# EAGLE board ANAL_5_PSU_REV_1_0 (EAGLE 7.6.0)
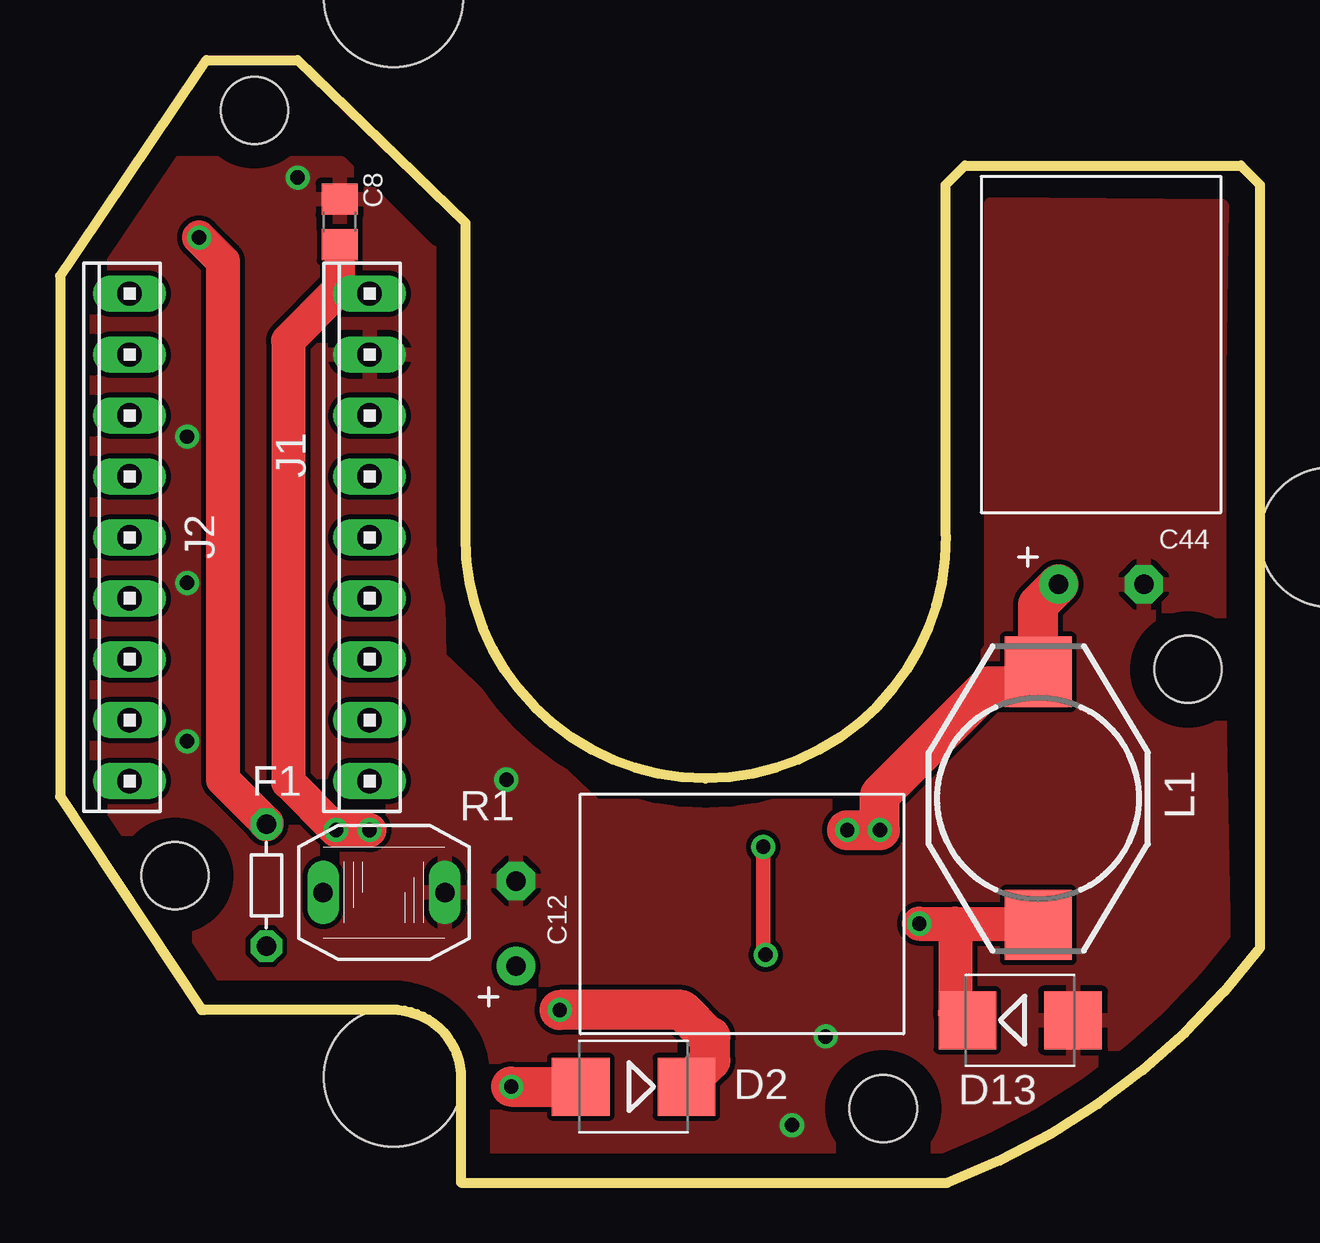
[diagram p0: board, top side]
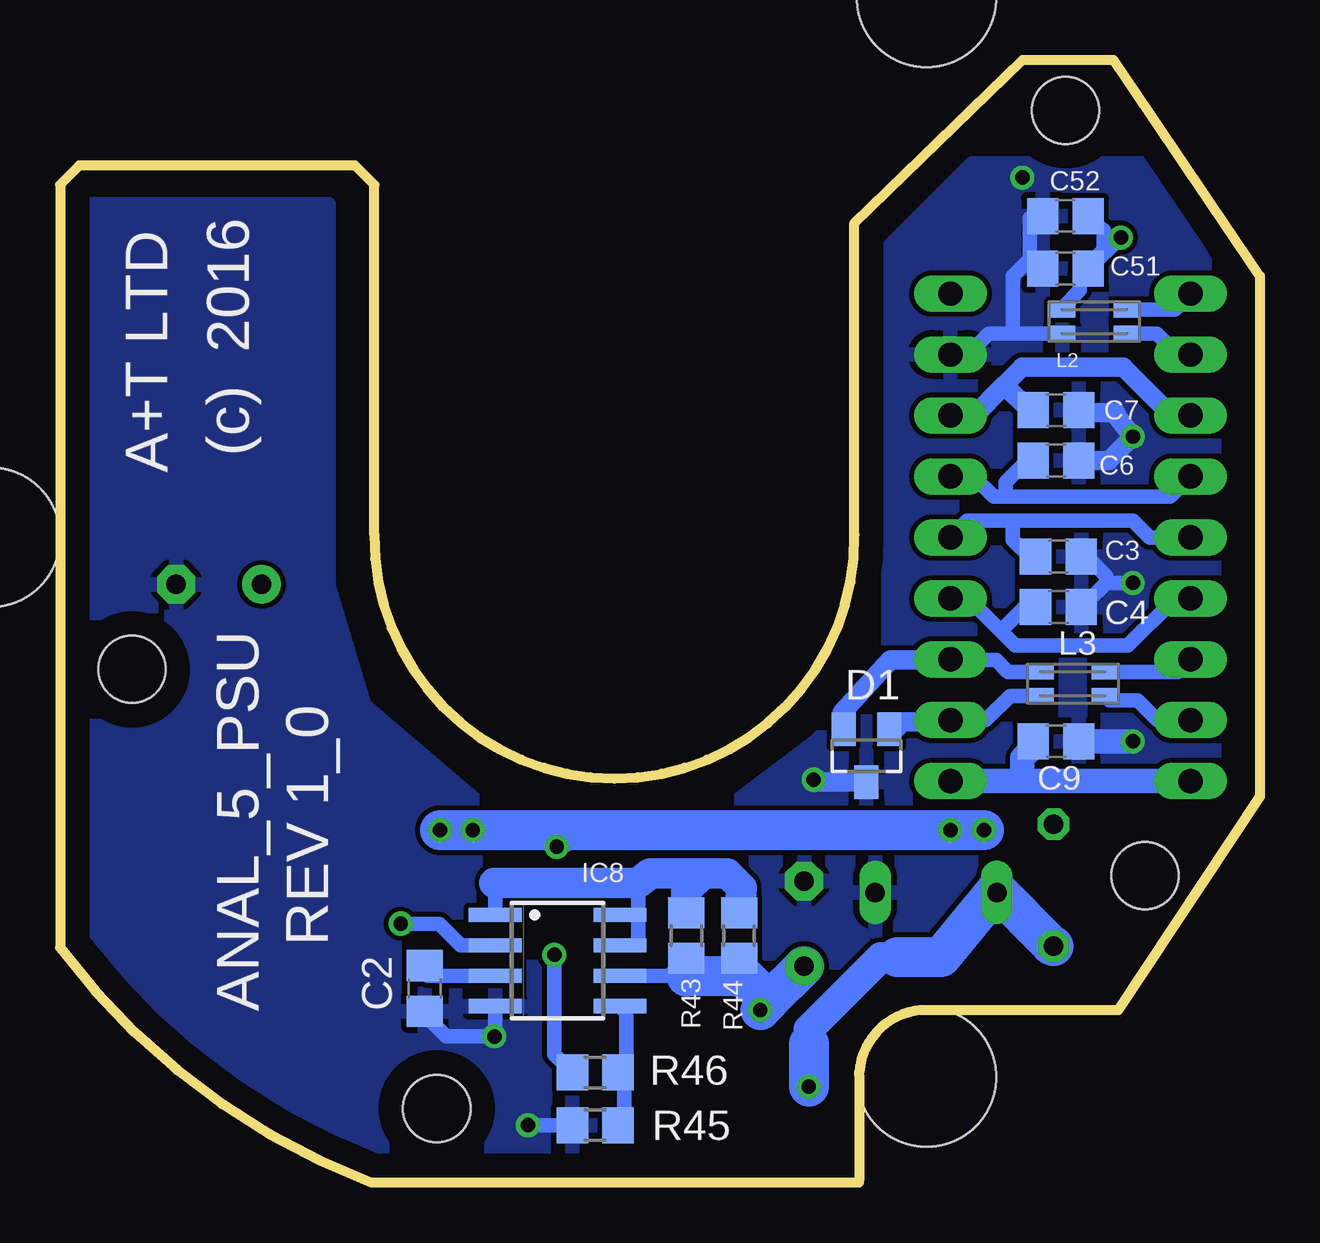
[diagram p1: board, bottom side, seen from below]

Size 50 x 46.8 mm. Coordinates in mm from the lower left corner, seen from the top.
Outline: 16.7,0 37,0 arc32 50,9.8 50,41.6 49.2,42.4 37.7,42.4 36.9,41.6 36.9,27 arc-182 16.9,27 16.9,40 9.9,46.8 6.1,46.8 0,37.8 0,16.1 5.9,7.2
Outline: 6,7.2 14.1,7.2 arc-81 16.7,4.6
Outline: 16.7,4.5 16.7,0.1 16.8,0
Copper layers (1*16): Top 0.035mm / dielectric 1.5mm / Bottom 0.035mm
Design rules "default *": minimum track width 6mil, minimum drill 15mil, track to track 8mil, track to pad 8mil, pad to pad 8mil, via to via 8mil, smd to smd 8mil, copper to edge 40mil, drill to drill 8mil, minimum pad ring 10mil, minimum via ring 8mil, stop-mask expansion 4mil, vias tented up to drill 0mil, thermal gap 10mil
Holes 5.8 mm at 13.9,49.4 13.9,4.4 52.9,26.9
Holes 2.8 mm at 47,21.4 34.3,3.1 4.8,12.8 8.1,44.7

## Footprints (pad centres in the part's own frame; a part is rotated, then mirrored left to right if it is on the bottom)
C0805 = smd 1.3 x 1.5: 1 -0.95,0; 2 0.95,0
E3,5-10SIDE2 = drill 0.813 pad 1.6: + -1.778,0 | drill 0.813 pad 1.6 octagon: - 1.778,0
E3,5-10SIDE = drill 0.813 pad 1.6: + -1.778,0 | drill 0.813 pad 1.6 octagon: - 1.778,0
SOT23 = smd 1 x 1.4: 1 -0.95,-1.1; 2 0.95,-1.1; 3 0,1.1
SMB = smd 2.4 x 2.4: A 2.2,0; C -2.2,0
R-5 = drill 0.813 octagon: 1 -2.54,0; 2 2.54,0
SO08 = smd 0.6 x 2.2: 1 -1.905,-2.6; 2 -0.635,-2.6; 3 0.635,-2.6; 4 1.905,-2.6; 5 1.905,2.6; 6 0.635,2.6; 7 -0.635,2.6; 8 -1.905,2.6
10X09MTA = drill 1.016 long: 1 10.16,0; 2 7.62,0; 3 5.08,0; 4 2.54,0; 5 0,0; 6 -2.54,0; 7 -5.08,0; 8 -7.62,0; 9 -10.16,0
DO3316P = smd 2.92 x 2.79: 1 -5.28,0; 2 5.28,0
DLW31S = smd 0.66 x 1.1: 1 -0.5,-1.35; 2 -0.5,1.35; 3 0.5,1.35; 4 0.5,-1.35
P592 = drill 0.813 long: 1 0,2.54; 2 0,-2.54
R0805 = smd 1.3 x 1.5: 1 -0.95,0; 2 0.95,0

## Placement (x,y rotation side)
C2  470p  [C0805]  34.8,8.1 270 bottom
C3  1n  [C0805]  8.4,26.1 0 bottom
C4  1n  [C0805]  8.4,24 0 bottom
C6  330p  [C0805]  8.5,30.1 0 bottom
C7  330p  [C0805]  8.5,32.2 0 bottom
C8  100n  [C0805]  11.65,40.05 90 top
C9  1n  [C0805]  8.5,18.4 0 bottom
C12  100u  [E3,5-10SIDE2]  19,10.8 90 top
C44  470u  [E3,5-10SIDE]  43.38,24.94 0 top
C51  100n  [C0805]  8.1,38.1 180 bottom
C52  1n  [C0805]  8.1,40.3 180 bottom
D1  NUP2105L  [SOT23]  16.4,17.8 180 bottom
D2  STPS160U  [SMB]  23.9,4 180 top
D13  STPS160U  [SMB]  40.01,6.77 0 top
F1  330mA  [R-5]  8.6,12.4 90 top
IC8  MC34063AD  [SO08]  29.27,9.26 270 bottom
J1  Samtec TSW-109-15-F-S  [10X09MTA]  12.9,26.9 90 top
J2  [10X09MTA]  2.9,26.9 90 top
L1  [DO3316P]  40.76,16.02 90 top
L2  Coilcraft 1206USB-102MLB  [DLW31S]  6.9,35.9 90 bottom
L3  DLW31SN222SQ2L  [DLW31S]  7.8,20.8 270 bottom
R1  27Z1  [P592]  13.5,12.1 90 top
R43  0R5  [R0805]  23.9,10.3 270 bottom
R44  0R5  [R0805]  21.7,10.3 270 bottom
R45  3k3  [R0805]  27.7,2.4 0 bottom
R46  10k  [R0805]  27.7,4.6 0 bottom

## Library data of the parts
C2-C4 C6-C9 C51 C52 R43-R46 = rcl
C12 C44 L2 L3 = AWR
D1 = AWR; FARNELL: 2101833
D2 D13 = diode
F1 R1 = varistor
IC8 = v-reg-3
J1 J2 = con-amp
L1 = inductor-coilcraft; OC_FARNELL: unknown; OC_NEWARK: unknown

## Nets
+5V: C8.1 C44.+ J1.1 L1.2 R46.1
+12V: C12.+ D2.C IC8.6 R43.2 R44.2
FUSED: D2.A F1.1 R1.1
GND: C2.2 C3.2 C4.2 C6.2 C7.2 C8.2 C9.2 C12.- C44.- C51.2 C52.2 D1.3 D13.A IC8.4 J1.2 L2.2 R1.2 R45.1
N$1: C3.1 J1.5 J2.5
N$2: C6.1 J1.4 J2.4
N$3: C4.1 J1.6 J2.6
N$4: D1.2 J1.7 L3.1
N$5: D1.1 J1.8 L3.4
N$6: C9.1 J1.9 J2.9
N$7: J2.2 L2.1
N$8: J2.1 L2.4
N$9: J2.7 L3.2
N$11: J2.8 L3.3
N$14: C7.1 J1.3 J2.3
N$79: D13.C IC8.2 L1.1
N$81: IC8.1 IC8.7 IC8.8 R43.1 R44.1
N$83: IC8.5 R45.2 R46.2
N$84: C2.1 IC8.3
SUPPLY: C51.1 C52.1 F1.2 L2.3

## Tracks (layer width: path | path; a pad name or v marks a point on that pad's centre or on a via)
+5V  (via drill 0.6)
  Top 0.61: v29.3,14 29.2,14 29.3,14.1 v29.3,14 | v29.3,14 29.3,9.6 v29.4,9.5
  Top 1.27: C8.1 11.65,37.25
  Top 1.422: 11.5,37.1 9.5,35.1 9.5,16.7 v11.5,14.7 v12.9,14.7 | 11.5,37.1 12.94,37.1 J1.1 | 11.65,37.25 11.5,37.1
  Top 1.676: v32.8,14.7 v34.16,14.7 34.16,16.16 38.7,20.7 40.16,20.7 L1.2 40.76,24.1 C44.+
  Bottom 0.61: v29.4,9.5 29.4,5.35 R46.1
  Bottom 0.813: v29.3,14 28.1,14.6 28.2,14.7
  Bottom 1.422: v11.5,14.7 v12.9,14.7
  Bottom 1.676: v11.5,14.7 28.2,14.7 v32.8,14.7 v34.16,14.7
+12V  (via drill 0.6)
  Top 1.676: D2.C 26.1,4.1 27.1,5.1 27.1,6.1 27,6.1 25.9,7.2 v20.82,7.2
  Bottom 0.61: IC8.6 24.62,8.62 24.27,8.97 | 24.27,8.97 R43.2 | 24.27,8.97 23.9,8.6 | 21.6,9.3 21.6,8.8 21.8,8.6
  Bottom 1.016: R44.2 21.6,9.3
  Bottom 1.676: 23.9,8.6 21.8,8.6 21.5,8.6 20.46,7.56 | v20.82,7.2 20.46,7.56 | 20.46,7.56 C12.+
FUSED  (via drill 0.6)
  Top 1.676: v18.8,4 D2.A
  Bottom 1.27: 15.1,9.4 15.8,9.4 18.8,6.4 18.8,5.8
  Bottom 1.676: F1.1 8.7,9.9 11,12.2 | 11,12.2 R1.1 10.96,11.74 11,12.2 | 11,12.2 13.3,9.4 15.1,9.4 | 18.8,5.8 v18.8,4
GND  (via drill 0.6)
  Bottom 0.61: IC8.4 31.87,6.6 | 31.87,6.6 31.87,6.13 v31.9,6.1 | C2.2 34.55,6.75 33.9,6.1 v31.9,6.1 | v31.9,6.1 31.87,6.6 | 9.6,39.8 9,40.2 9.6,40.2 9.6,39.8 | J1.2 12.72,34.7 12,34.7 11.3,35.4 10.2,35.4 | C3.2 7.2,26.1 6.4,25.3 6.4,25 | 6.4,25 6.9,24.5 6.95,24.5 C4.2 | 6.4,25 v5.3,25 | R45.1 v30.5,2.4 | 9.6,38.5 9.05,38.5 C51.2 | L2.2 10.2,35.4 | 10.2,35.4 10.3,35.5 10.3,37.8 9.6,38.5 | 9.6,39.8 9.6,38.5
  Bottom 0.813: C6.2 6.3,30.1 v5.3,31.1 6,32 6,32.1 7.45,32.1 C7.2 | D1.3 18.5,16.7 v18.6,16.8
  Bottom 1.016: C9.2 v5.3,18.4
  other vias: 9.9,41.9
  pour Top: 4.6,42.5 11.7,42.5 15.3,38.9 15.5,38.8 15.8,21.9 22.3,15.7 33.5,15.7 38.8,22.3 38.8,40.8 48.4,40.7 48.3,33.8 48.3,19.8 48.5,10.1 47.1,7.5 43.5,4.3 40.5,3.3 38.5,0.9 32.9,-0.1 27.7,-1.5 21.7,-0.9 11.5,3.7 6.1,8.9 3.7,11.3 0.9,16.5 -0.3,22.9 -0.3,31.3 0.7,36.3
  pour Bottom: 4.8,42.5 12,42.5 15.5,39 15.5,22.2 18.4,18.5 22.1,15.7 32.4,15.7 37.3,19.9 38.8,24.9 38.8,40.8 48.7,40.8 48.7,10.6 45.5,6.8 41.6,3.8 36.8,1.3 18.1,1.3 18.1,5.2 17.3,7.1 14.8,8.6 6.4,8.6 1.9,15.6 1.9,37.8
N$1
  Bottom 0.61: 10.3,27.6 5.3,27.6 4.6,26.9 J2.5 | 10.3,27.6 12.2,27.6 J1.5 | C3.1 9.6,26.1 10.3,26.8 10.3,27.6
N$2
  Bottom 0.61: J1.4 11.94,29.44 11.1,28.6 10.4,28.6 | 10.4,28.6 3.74,28.6 J2.4 | C6.1 9.7,30.1 10.6,29.2 10.6,28.8 10.4,28.6
N$3
  Bottom 0.61: J1.6 12.16,24.36 10.8,23 | 10.8,23 10.2,22.4 5.5,22.4 3.6,24.3 2.96,24.3 J2.6 | C4.1 9.8,24 10.8,23
N$4
  Bottom 0.61: L3.1 10.5,21.3 11,21.8 12.88,21.8
  Bottom 0.813: 12.88,21.8 J1.7 12.92,21.8 15.4,21.8 17.4,19.6 17.4,18.95 D1.2
N$5
  Bottom 0.61: J1.8 11.42,19.28 10.4,20.3 L3.4
  Bottom 0.813: D1.1 15.2,18.9 14.9,19.2 12.98,19.2 J1.8
N$6
  Bottom 1.016: J2.9 9.9,16.74 | 9.9,16.74 J1.9 | C9.1 9.45,18.15 9.9,17.7 9.9,16.74
N$7
  Bottom 0.61: L2.1 4.3,35.4 3.6,34.7 3.08,34.7 J2.2
N$8
  Bottom 0.61: L2.4 3.56,36.4 J2.1
N$9
  Bottom 0.61: L3.2 3.42,21.3 J2.7
N$11
  Bottom 0.61: J2.8 4.28,19.28 5.1,20.1 6.25,20.1 L3.3
N$14
  Bottom 0.813: J2.3 3.68,31.98 5.7,34 9.9,34 10.65,33.25 | 10.65,33.25 12,31.9 12.82,31.9 J1.3 | C7.1 9.6,32.2 10.65,33.25
N$79  (via drill 0.6)
  Top 0.61: 40.7,10.8 L1.1
  Top 1.422: 37.3,10.8 40.7,10.8 | v35.8,10.8 37.3,10.8 | 37.3,10.8 37.3,7.08 D13.C
  Bottom 0.61: IC8.2 33.29,9.89 34.2,10.8 v35.8,10.8
N$81
  Bottom 0.61: R43.1 23.85,11.25 | IC8.7 26.01,9.89 25.9,10 25.9,11.2 | 25.9,11.2 25.9,12.5 25.6,12.8 25.3,12.9 | IC8.8 25.93,11.17 25.9,11.2 | IC8.1 31.87,12.47 31.9,12.5
  Bottom 1.27: 23.3,12.9 23.9,12.3 R43.1 23.9,12.2 23.2,12.9 | 23.3,12.9 23.2,12.9 | 23.2,12.9 22.2,12.9 21.6,12.3 R44.1 | 23.3,12.9 25.3,12.9 25.4,12.9 25.9,12.5 31.9,12.5
N$83
  Bottom 0.406: R46.2 26.65,4.6 26.65,4.65
  Bottom 0.61: 26.6,4.6 26.65,4.65 26.7,4.7 26.7,4.8 26.4,5.1 26.4,7.09 IC8.5 | R45.2 26.75,2.45 26.5,2.7 26.5,4.35 R46.2
N$84
  Bottom 0.61: IC8.3 34.68,8.62 C2.1
SUPPLY  (via drill 0.6)
  Top 1.422: v5.8,39.4 6.8,38.4 6.8,16.8 8.6,15 F1.2
  Bottom 0.61: L2.3 8.2,36.5 7.5,37.2 7.5,37.75 | 7.5,37.75 C51.1 v5.8,39.4 | 7.5,37.75 7.5,37.9 6.5,38.9 6.5,39.7 6.6,39.75 C52.1

## Text on the board
bNames: (c) 2016 | A+T LTD | ANAL_5_PSU | REV 1_0
Measures: bottom | pin 1